# EAGLE board WGSwitch (EAGLE 7.3.0)
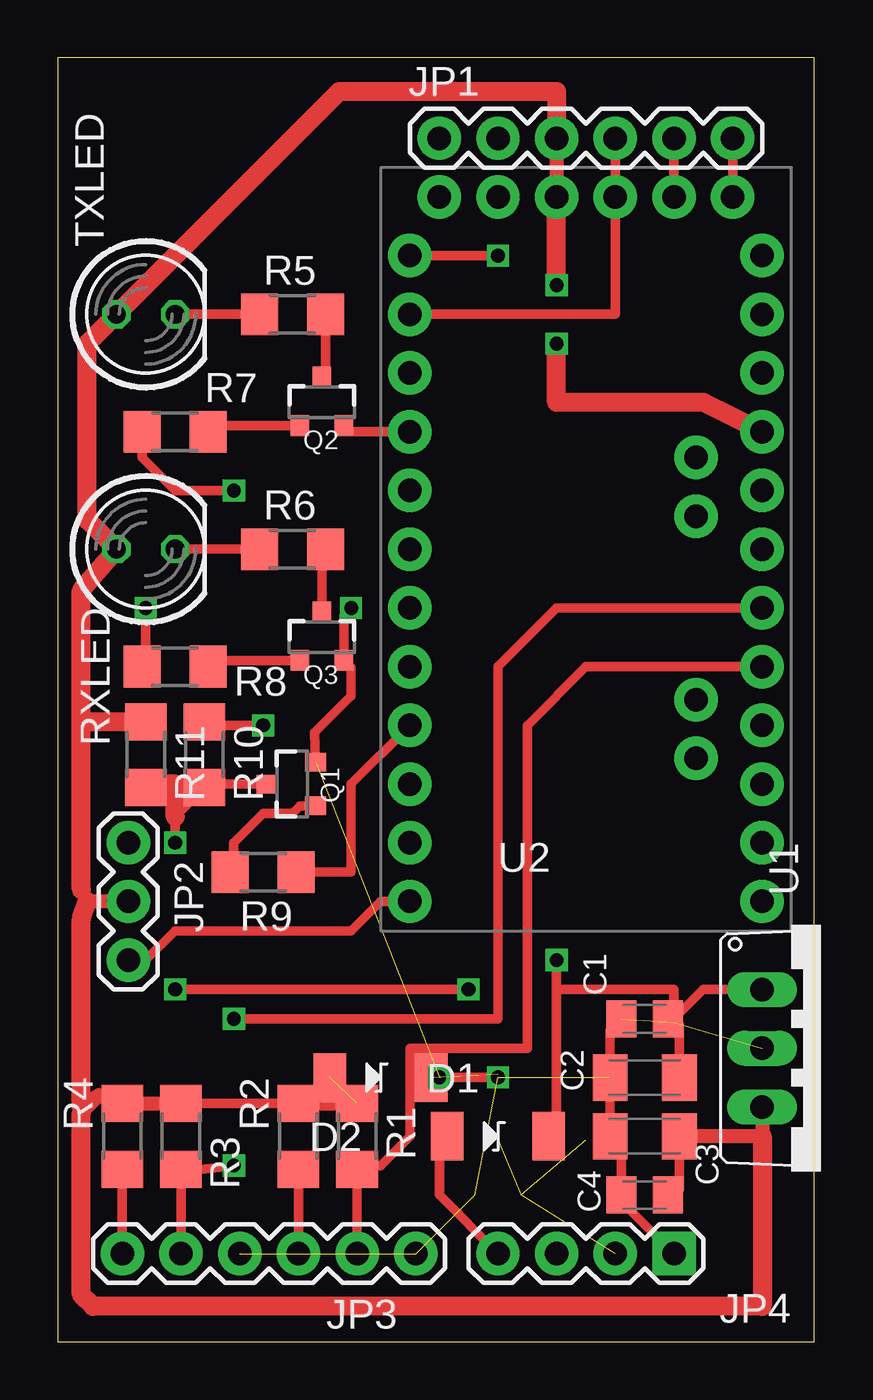
[diagram p0: board, top side]
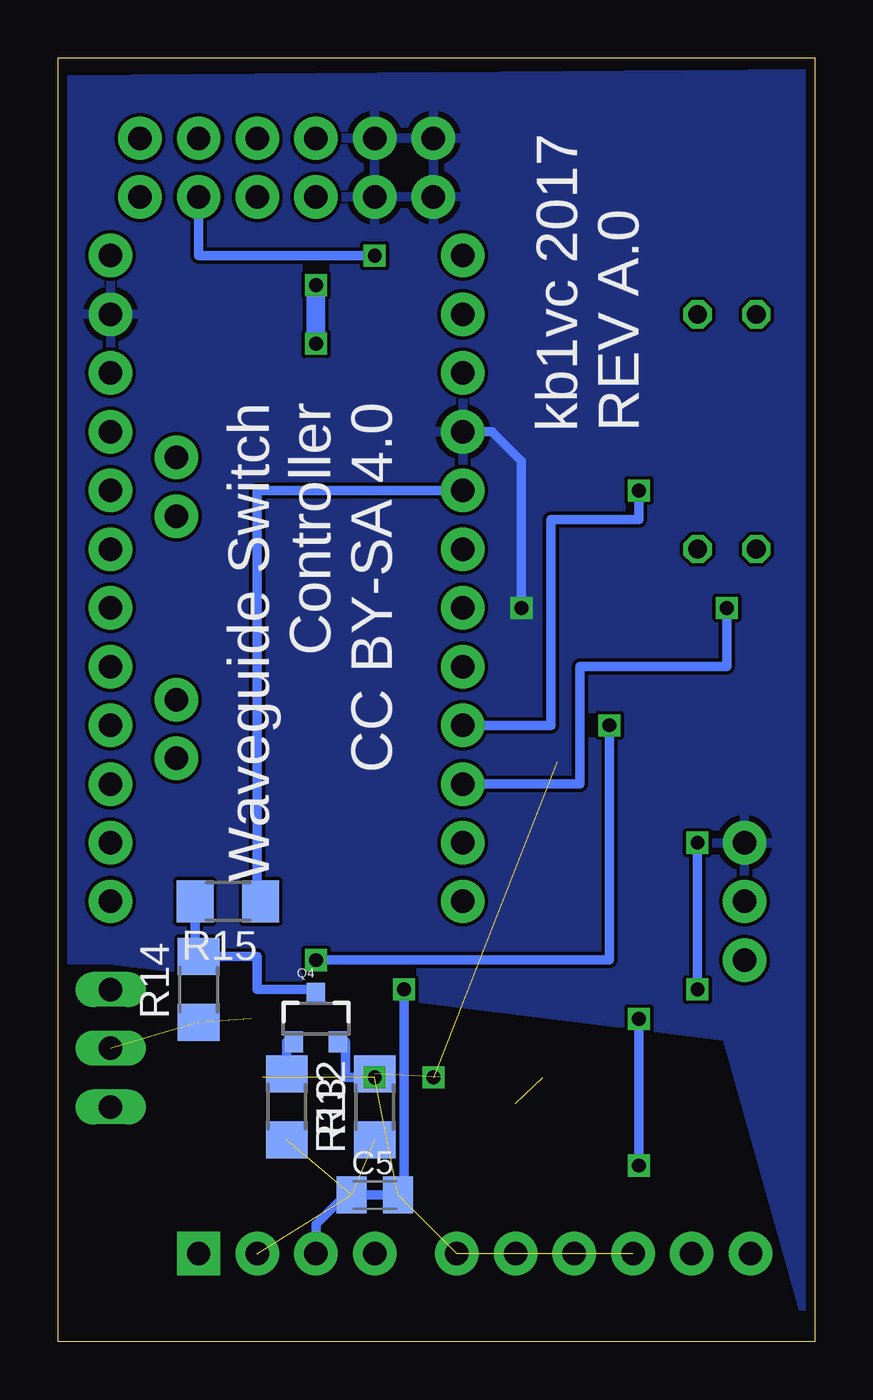
[diagram p1: board, bottom side, seen from below]

Size 32.75 x 55.55 mm. Coordinates in mm from the lower left corner, seen from the top.
Outline: 0,0 32.75,0 32.75,55.55 0,55.55 0,0
Copper layers (1*16): Top 0.0356mm / dielectric 1.5011mm / Bottom 0.0356mm
Design rules "oshpark-2layer": minimum track width 6mil, minimum drill 13mil, track to track 6mil, track to pad 6mil, pad to pad 6mil, via to via 6mil, smd to smd 6mil, copper to edge 15mil, drill to drill 6mil, minimum pad ring 7mil, minimum via ring 7mil, stop-mask expansion 2.5mil, vias tented up to drill 0mil, thermal gap 10mil

## Footprints (pad centres in the part's own frame; a part is rotated, then mirrored left to right if it is on the bottom)
C0805K = smd 1.3 x 1.6: 1 -1,0; 2 1,0
C1206K = smd 1.5 x 2: 1 -1.5,0; 2 1.5,0
SOD128 = smd 1.4 x 2.1: P$1 -2.2,0; P$2 2.2,0
1X06 = drill 1.016 pad 1.88: 1 0,0; 2 2.54,0; 3 5.08,0; 4 7.62,0; 5 10.16,0; 6 12.7,0
1X03 = drill 1.016 pad 1.88: 1 0,0; 2 2.54,0; 3 5.08,0
1X04 = drill 1.016 pad 1.88 square: 1 0,0 | drill 1.016 pad 1.88: 2 2.54,0; 3 5.08,0; 4 7.62,0
SOT23-3 = smd 0.8 x 0.9: 1 -0.95,-1; 2 0.95,-1; 3 0,1.1
R1206 = smd 1.6 x 1.803: 1 -1.422,0; 2 1.422,0
LED5MM = drill 0.813 octagon: A -1.27,0; K 1.27,0
TO220V = drill 1.016 long: 1 -2.54,-2.54; 2 0,-2.54; 3 2.54,-2.54
ARDUINO_PRO_MINI = drill 1.016 pad 1.88: 1 -7.62,12.7; 2 -7.62,10.16; 3 -7.62,7.62; 4 -7.62,5.08; 5 -7.62,2.54; 6 -7.62,0; 7 -7.62,-2.54; 8 -7.62,-5.08; 9 -7.62,-7.62; 10 -7.62,-10.16; 11 -7.62,-12.7; 12 -7.62,-15.24; 13 7.62,-15.24; 14 7.62,-12.7; 15 7.62,-10.16; 16 7.62,-7.62; 17 7.62,-5.08; 18 7.62,-2.54; 19 7.62,0; 20 7.62,2.54; 21 7.62,5.08; 22 7.62,7.62; 23 7.62,10.16; 24 7.62,12.7; A4 4.763,1.429; A5 4.763,3.969; A6 4.763,-9.049; A7 4.763,-6.509; BLK -6.35,15.24; GND -3.81,15.24; GRN 6.35,15.24; RXI 1.27,15.24; TXO 3.81,15.24; VCC -1.27,15.24

## Placement (x,y rotation side)
C1  0.1  [C0805K]  25.4,13.97 180 top
C2  10  [C1206K]  25.4,11.43 180 top
C3  10  [C1206K]  25.4,8.89 180 top
C4  0.1  [C0805K]  25.4,6.35 180 top
C5  0.1  [C0805K]  19.05,6.35 0 bottom
D1  PMEG3030EP  [SOD128]  19.05,8.89 0 top
D2  PMEG3030EP  [SOD128]  13.97,11.43 0 top
JP1  FTDI Header  [1X06]  16.51,52.07 0 top
JP2  To Servo  [1X03]  3.05,16.51 90 top
JP3  Optical Sensors  [1X06]  2.79,3.81 0 top
JP4  PWR-CTL  [1X04]  26.67,3.81 180 top
Q1  MMBT3904  [SOT23-3]  10.16,24.13 90 top
Q2  MMBT3904  [SOT23-3]  11.43,40.64 0 top
Q3  MMBT3904  [SOT23-3]  11.43,30.48 0 top
Q4  PMBT3906  [SOT23-3]  21.59,13.97 0 bottom
R1  10K  [R1206]  12.95,8.89 270 top
R2  68  [R1206]  10.41,8.89 270 top
R3  10K  [R1206]  5.33,8.89 270 top
R4  68  [R1206]  2.79,8.89 270 top
R5  220  [R1206]  10.16,44.45 0 top
R6  220  [R1206]  10.16,34.29 0 top
R7  10K  [R1206]  5.08,39.37 0 top
R8  10K  [R1206]  5.08,29.21 0 top
R9  10K  [R1206]  8.89,20.32 180 top
R10  10K  [R1206]  6.35,25.4 270 top
R11  10K  [R1206]  3.81,25.4 270 top
R12  10K  [R1206]  19.05,10.16 90 bottom
R13  10K  [R1206]  22.86,10.16 270 bottom
R14  10K  [R1206]  26.67,15.24 90 bottom
R15  10K  [R1206]  25.4,19.05 180 bottom
RXLED  RED  [LED5MM]  3.81,34.29 0 top
TXLED  GRN  [LED5MM]  3.81,44.45 0 top
U1  7805TV  [TO220V]  33.02,12.7 270 top
U2  ARDUINO_PRO_MINI  [ARDUINO_PRO_MINI]  22.86,34.29 0 top

## Library data of the parts
C1-C5 R1-R15 = rcl
D1 D2 = kb1vc_robot_parts
JP1 JP3 = SparkFun-Connectors; PROD_ID: CONN-08437
JP2 JP4 = SparkFun-Connectors
Q1-Q3 = kb1vc_Arduino_Parts; PROD_ID: TRANS-08049
Q4 = SparkFun-DiscreteSemi; PROD_ID: TRANS-08052
RXLED TXLED = led
U1 = linear
U2 = kb1vc_Arduino_Parts

## Nets
+12V: C1.1 C2.1 D1.P$2 R10.1 U1.1
DTR: JP1.6 U2.GRN
GND: C1.2 C2.2 C3.2 C4.2 C5.2 JP1.1 JP1.2 JP2.3 JP3.3 JP3.6 JP4.1 Q1.2 Q2.2 Q3.2 R14.1 U1.2 U2.4 U2.23 U2.BLK U2.GND
N$1: JP2.1 U2.12
N$2: Q1.1 R9.2
N$3: Q2.1 R7.2
N$4: R6.1 RXLED.K
N$5: D2.P$2 Q4.2 R12.2
N$6: Q2.3 R5.2
N$7: Q3.3 R6.2
N$8: Q3.1 R8.2
N$9: Q4.1 R13.1
N$10: D1.P$1 JP4.4
N$12: Q4.3 R14.2 R15.2
PTT_H: R15.1 U2.5
PTT_IN_RAW_L: C5.1 JP4.2 R12.1 R13.2
RX_D: JP3.1 R4.2
RX_ON: R8.1 U2.10
RX_SENSE: JP3.2 R3.2 U2.18
RXI: JP1.4 U2.2 U2.RXI
TX_D: JP3.4 R2.2
TX_EN_OUT_L: JP4.3 Q1.3 R10.2 R11.2
TX_LED: R5.1 TXLED.K
TX_ON: R7.1 R9.1 U2.9
TX_SENSE: JP3.5 R1.2 U2.17
TXO: JP1.5 U2.1 U2.TXO
VCC: C3.1 C4.1 D2.P$1 JP1.3 JP2.2 R1.1 R2.1 R3.1 R4.1 R11.1 RXLED.A TXLED.A U1.3 U2.21 U2.VCC

## Tracks (layer width: path | path; a pad name or v marks a point on that pad's centre or on a via)
+12V  (via drill 0.6)
  Top 0.406: C1.1 26.67,13.97 | 26.67,13.97 27.94,15.24 U1.1 | C2.1 26.9,13.74 26.67,13.97 | 26.67,13.97 26.67,15.24 21.59,15.24 | 21.59,15.24 21.59,9.23 D1.P$2 | v8.89,26.67 6.5,26.67 R10.1 | 21.59,15.24 v21.59,16.51
  Bottom 0.406: v21.59,16.51 8.89,16.51 v8.89,26.67
DTR
  Top 0.406: JP1.6 U2.GRN
GND  (via drill 0.6)  (7 unrouted)
  Top 0.406: Q2.2 12.38,39.69 12.7,39.37 U2.4 | Q1.2 11.11,26.35 12.7,27.94 12.7,29.16 Q3.2 12.38,31.43 v12.7,31.75 | C1.2 23.9,13.47 C2.2 C3.2 24.4,8.39 C4.2 24.4,6.08 JP4.1 | v16.51,11.43 v19.05,11.43
  Bottom 0.406: v12.7,31.75 12.7,38.1 13.97,39.37 U2.4
  pour Bottom: 0.25,54.86 32.26,54.61 32.26,16.51 30.48,16.51 3.81,13.21 0.25,0.51
N$1
  Top 0.406: JP2.1 3.81,16.51 5.08,17.78 12.7,17.78 13.97,19.05 U2.12
N$2
  Top 0.406: Q1.1 10.48,23.18 10.16,22.86 8.89,22.86 7.62,21.59 7.62,20.47 R9.2
N$3
  Top 0.406: Q2.1 6.77,39.64 R7.2
N$4
  Top 0.406: R6.1 RXLED.K
N$5  (1 unrouted)
  Bottom 0.406: Q4.2 20.32,12.97 20.32,11.43 19.05,11.43 R12.2
N$6
  Top 0.406: R5.2 11.58,41.89 Q2.3
N$7
  Top 0.406: Q3.3 11.43,34.14 R6.2
N$8
  Top 0.406: Q3.1 6.77,29.48 R8.2
N$9
  Bottom 0.406: Q4.1 22.86,12.97 R13.1
N$10
  Top 0.406: JP4.4 16.51,6.35 16.51,8.55 D1.P$1
N$12
  Bottom 0.406: R15.2 26.82,16.66 R14.2 24.13,16.66 24.13,15.24 21.59,15.24 Q4.3
PTT_H
  Bottom 0.406: R15.1 24.13,19.05 24.13,36.83 U2.5
PTT_IN_RAW_L  (3 unrouted)
RX_D
  Top 0.406: R4.2 JP3.1
RX_ON  (via drill 0.6)
  Top 0.406: v3.81,31.75 3.81,29.06 R8.1
  Bottom 0.406: v3.81,31.75 3.81,29.21 10.16,29.21 10.16,24.13 U2.10
RX_SENSE  (via drill 0.6)
  Top 0.406: JP3.2 R3.2 6.2,7.47 v7.62,7.62 | v7.62,13.97 19.05,13.97 19.05,29.21 21.59,31.75 U2.18
  Bottom 0.406: v7.62,7.62 v7.62,13.97
RXI
  Top 0.406: JP1.4 U2.RXI 24.13,44.45 U2.2
TX_D
  Top 0.406: R2.2 JP3.4
TX_EN_OUT_L  (via drill 0.6)
  Top 0.406: Q1.3 6.5,24.13 R10.2 5.08,22.71 v5.08,21.59 | v5.08,15.24 v17.78,15.24
  Top 0.813: 5.08,22.71 5.08,24.13 3.81,24.13 R11.2
  Bottom 0.406: v5.08,15.24 v5.08,21.59 | v17.78,15.24 17.78,6.35 20.32,6.35 21.59,5.08 JP4.3
TX_LED
  Top 0.406: R5.1 TXLED.K
TX_ON  (via drill 0.6)
  Top 0.406: U2.9 12.7,24.13 12.7,20.32 R9.1 | R7.1 3.66,38.25 5.08,36.83 v7.62,36.83
  Bottom 0.406: U2.9 11.43,26.67 11.43,35.56 7.62,35.56 v7.62,36.83
TX_SENSE
  Top 0.406: JP3.5 R1.2 12.85,7.62 13.97,7.62 15.24,8.89 15.24,12.7 20.32,12.7 20.32,26.67 22.86,29.21 U2.17
TXO  (via drill 0.6)
  Top 0.406: JP1.5 U2.TXO | U2.1 v19.05,46.99
  Bottom 0.406: v19.05,46.99 26.67,46.99 U2.TXO
VCC  (via drill 0.6)  (1 unrouted)
  Top 0.406: C3.1 26.9,6.58 26.67,6.35 C4.1 | R4.1 2.13,10.31 1.78,10.67 | R3.1 R2.1
  Top 0.61: JP1.3 U2.VCC | U1.3 30.48,8.89 C3.1 | JP2.2 1.27,19.05 1.02,19.56 | R4.1 R3.1 | R2.1 R1.1 | 1.02,10.16 1.78,10.67 1.02,9.91
  Top 0.813: U2.21 27.94,40.64 21.59,40.64 v21.59,43.18 | v21.59,45.72 U2.VCC | 1.02,19.56 1.02,26.82 | 1.02,26.82 1.02,32.51 RXLED.A 1.27,35.56 1.27,43.18 TXLED.A 12.19,54.1 21.59,54.1 JP1.3 | 1.02,10.16 1.02,18.29 1.27,19.05 | 30.48,8.89 30.48,1.52 1.52,1.52 1.02,2.03 1.02,9.91 | R11.1 1.02,26.82
  Bottom 0.813: v21.59,43.18 v21.59,45.72

## Text on the board
bPlace: Waveguide Switch / Controller / CC BY-SA 4.0 | kb1vc 2017 / REV A.0